# EAGLE board Pocket-Step-Up-Converter (EAGLE 6.5.0)
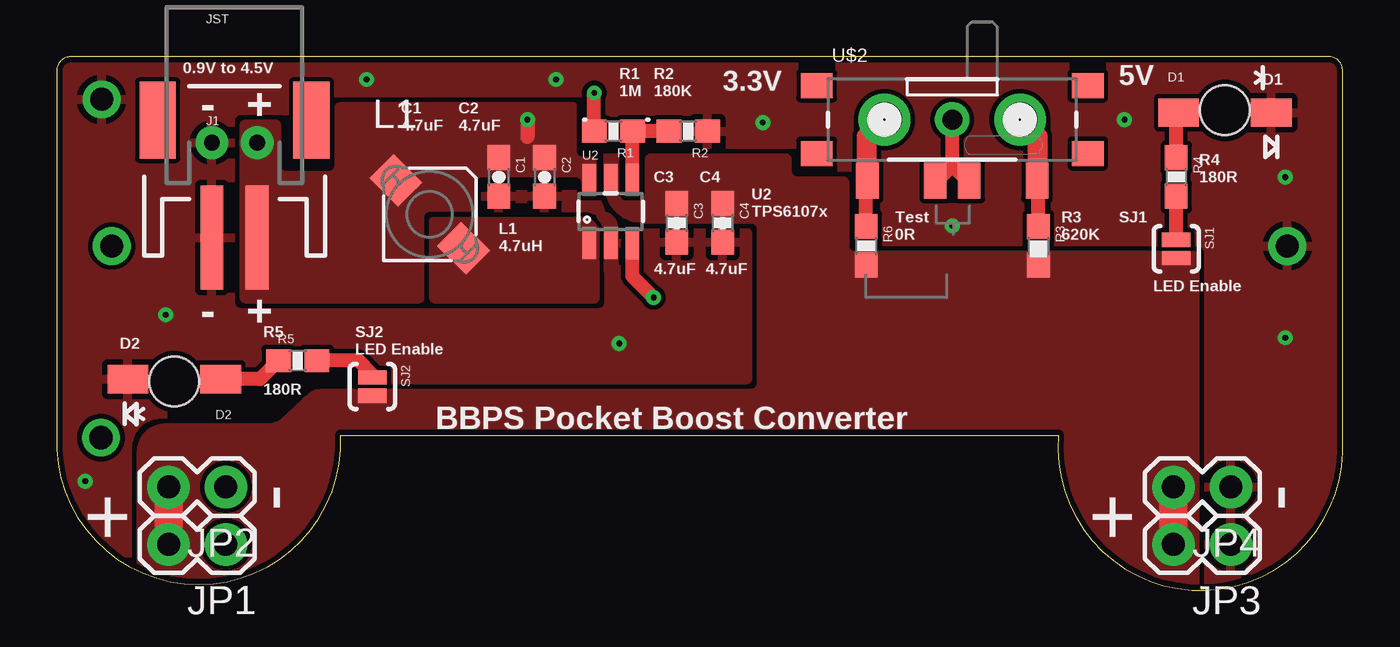
[diagram p0: board, top side]
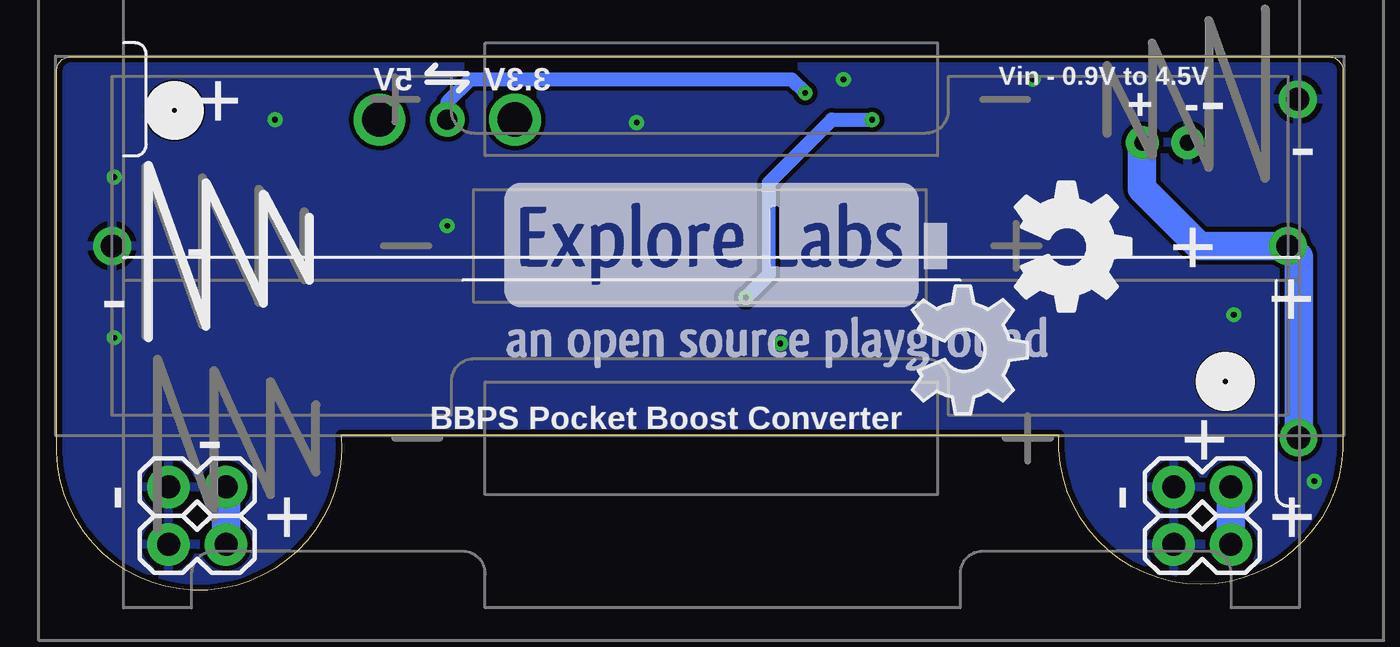
[diagram p1: board, bottom side, seen from below]

Size 56.91 x 23.62 mm. Coordinates in mm from the lower left corner, seen from the top.
Outline: 0,6.86 arc186 12.57,6.86 44.32,6.86 arc189 56.9,6.73 56.9,22.99 arc90 56.26,23.62 0.64,23.61 arc89 0,22.98 0,6.86
Copper layers (1*16): Top 0.035mm / dielectric 1.5mm / Bottom 0.035mm
Design rules "myDRUSparkFun 2": minimum track width 10mil, minimum drill 10mil, track to track 8mil, track to pad 8mil, pad to pad 8mil, via to via 8mil, smd to smd 8mil, copper to edge 10mil, drill to drill 8mil, minimum pad ring 10mil, minimum via ring 8mil, stop-mask expansion 4mil, vias tented up to drill 18mil, thermal gap 10mil
tRestrict: area 20.4,17.7 to 21,18; area 22.5,17.7 to 23,18; area 20.4,16.8 to 21,17.1

## Footprints (pad centres in the part's own frame; a part is rotated, then mirrored left to right if it is on the bottom)
BATTERY-AA-HOLDER-BBPS = drill 1.02 pad 1.676: GND 26,0; PWR -26,0
BATTERY-2AA-HOLDER-BBPS = drill 1.02 pad 1.676: GND -25.946,-7.5; PWR -25.974,7.47
0603-CAP = smd 1.1 x 1: 1 -0.85,0; 2 0.85,0
LED-REV-MOUNT = smd 1.8 x 1.25: ANODE -2.05,-0.1; CATHODE 2.05,-0.1 | hole 2.2: 0,0
JST-2-SMD = smd 1 x 4.6: 1 -1,-3.7; 2 1,-3.7 | smd 1.6 x 3.4: NC1 -3.4,1.5; NC2 3.4,1.5
1X02 = drill 1.016 pad 1.88: 1 0,0; 2 2.54,0
JST-2-PTH-NS = drill 0.7 pad 1.448: 1 -1,0; 2 1,0
INDUCTOR-MSS4020 = smd 1.5 x 1.8 rotated 45: 1 -1.5,1.5; 2 1.5,-1.5
0603-RES = smd 1.1 x 1: 1 -0.85,0; 2 0.85,0
SJ_2S-NOTRACE = smd 0.635 x 1.27: 1 -0.401,0; 2 0.413,0
DDC = smd 1.4 x 0.6: 1 -1.4,0.95; 2 -1.4,0; 3 -1.4,-0.95; 4 1.4,-0.95; 5 1.4,0; 6 1.4,0.95
SWITCH-SPST-SMD-A-FOR-BBPS = smd 1 x 1.6: A 3.75,-2.7; B 0.75,-2.7; C -0.75,-2.7; D -3.75,-2.7 | smd 1.4 x 1.1: GND@1 -6,1.5; GND@2 -6,-1.5; GND@3 6,1.5; GND@4 6,-1.5

## Placement (x,y rotation side)
BAT1  [BATTERY-AA-HOLDER-BBPS]  28.45,15.24 180 bottom
BAT2  [BATTERY-2AA-HOLDER-BBPS]  27.94,14.22 180 bottom
C1  4.7uF  [0603-CAP]  19.56,18.29 270 top
C2  4.7uF  [0603-CAP]  21.59,18.29 270 top
C3  4.7uF  [0603-CAP]  27.43,16.25 270 top
C4  4.7uF  [0603-CAP]  29.46,16.25 270 top
D1  Reverse Mount LED  [LED-REV-MOUNT]  51.69,21.23 0 top
D2  Reverse Mount LED  [LED-REV-MOUNT]  5.21,9.24 180 top
J1  [JST-2-SMD]  7.87,19.3 0 top
JP1  [1X02]  7.49,2.03 180 top
JP2  [1X02]  7.49,4.57 180 top
JP3  [1X02]  51.95,2.03 180 top
JP4  [1X02]  51.95,4.57 180 top
JST  [JST-2-PTH-NS]  7.87,19.81 0 top
L1  4.7uH  [INDUCTOR-MSS4020]  16.51,16.64 0 top
LOGO1  OSHW_LOGO_FILLX0200-NT  [OSHW_FILLX200_NOTEXT]  19.05,13.46 270 bottom
LOGO2  OSHW-LOGOS  [OSHW-LOGO-S]  65.53,-6.61 0 top  (outside the outline)
R1  1M  [0603-RES]  24.64,20.32 180 top
R2  180K  [0603-RES]  27.94,20.32 180 top
R3  620K  [0603-RES]  43.43,15.24 270 top
R4  180  [0603-RES]  49.53,18.29 270 top
R5  180  [0603-RES]  10.67,10.16 0 top
R6  8K  [0603-RES]  35.81,15.24 270 top
SJ1  SOLDERJUMPERNC2  [SJ_2S-NOTRACE]  49.53,15.11 270 top
SJ2  SOLDERJUMPERNC2  [SJ_2S-NOTRACE]  13.97,9.02 270 top
U2  TPS61070  [DDC]  24.51,16.76 90 top
U$2  SWITCH_SPDTSMD-NO-HOLES  [SWITCH-SPST-SMD-A-FOR-BBPS]  39.62,20.83 0 top
U$4  [EXLABS_LOGO_0.5]  37.85,8.13 0 bottom

## Library data of the parts
BAT1 BAT2 D1 D2 L1 U2 U$2 = 11xLabs
C1-C4 R1-R6 SJ1 SJ2 = SparkFun-Passives
J1 = SparkFun-Connectors; PROD_ID: CONN-08352
JP1-JP4 JST = SparkFun-Connectors
LOGO1 = ohw-logo
LOGO2 = SparkFun-Aesthetics
U$4 = ExLabs_Logo

## Nets
GND: BAT1.GND BAT2.GND C1.2 C2.2 C3.2 C4.2 D1.CATHODE D2.CATHODE J1.1 JP1.1 JP2.1 JP3.1 JP4.1 JST.1 R2.1 U2.2
N$1: R5.2 SJ2.1
N$2: R3.1 U$2.A
N$3: R1.1 R2.2 U2.4
N$4: R1.2 U$2.B U$2.C
N$5: D2.ANODE R5.1
N$6: R6.1 U$2.D
N$7: R4.2 SJ1.1
N$8: D1.ANODE R4.1
SW: L1.2 U2.1
VBAT: BAT1.PWR BAT2.PWR C1.1 C2.1 J1.2 JST.2 L1.1 U2.3 U2.6
VOUT: C3.1 C4.1 JP1.2 JP2.2 JP3.2 JP4.2 R3.2 R6.2 SJ1.2 SJ2.2 U2.5

## Tracks (layer width: path | path; a pad name or v marks a point on that pad's centre or on a via)
GND  (via drill 0.25)
  other vias: 13.72,22.6 24.89,10.92 1.27,4.82 54.36,11.17 47.24,20.83 54.36,18.29 31.24,20.7 22.1,22.6 4.83,12.19 39.62,16.13
  pour Top (rank 6): -1.02,-2.54 12.7,-2.54 12.7,6.86 44.2,6.86 44.2,-2.54 56.9,-2.54 56.9,25.4 -1.02,25.4
  pour Bottom (rank 6): -2.54,-0.26 12.7,-0.26 12.7,6.86 44.2,6.86 44.2,-0.51 58.17,-0.51 58.17,27.18 -2.54,27.18
  pour Top (no thermals): 24.23,14.07 24.23,15.98 arc11 23.95,16.43 23.82,16.8 arc-100 24.84,15.95 24.84,14.07
N$1
  Top 0.61: R5.2 13.36,10.16 13.97,9.54 SJ2.1
N$2
  Top 0.406: 43.43,18.13 U$2.A
  Top 0.61: R3.1 43.43,18.07 U$2.A
  Top 0.813: U$2.A 43.37,19.62
N$3
  Top 0.61: U2.4 25.46,20.29 R1.1 R2.2
N$4  (via drill 0.25, 0.89 pad 1.52)
  Top 0.61: 39.62,18.79 38.96,18.13 U$2.C | 39.62,18.79 40.29,18.13 U$2.B | R1.2 v23.79,22.01 | 39.62,18.79 v39.62,20.83
  Bottom 0.61: v23.79,22.01 24.38,22.6 38.61,22.6 39.62,21.59 v39.62,20.83
N$5
  Top 0.61: R5.1 9,9.34 D2.ANODE
N$6
  Top 0.406: 35.81,18.13 U$2.D
  Top 0.61: R6.1 35.81,17.98 arc-45 U$2.D
  Top 0.813: U$2.D 35.87,19.62
N$7
  Top 0.61: SJ1.1 R4.2
N$8
  Top 0.61: R4.1 49.53,21.02 D1.ANODE
N$9  (via drill 1.52)
  other vias: 36.63,20.83
N$11
  Top 0.813: 35.81,18.79 35.81,20.06 36.58,20.83
N$12  (via drill 1.52)
  other vias: 42.62,20.83
N$13
  Top 0.813: 43.43,18.54 43.43,20.06 42.67,20.83
SW
  pour Top (no thermals): 16.51,12.95 16.51,16.38 arc-90 16.76,16.51 23.24,16.51 arc-90 24,15.75 24,12.95 arc-90 23.75,12.7 16.76,12.7 arc-90
VBAT  (via drill 0.25)
  Top 0.61: U2.3 25.46,13.91 v26.42,12.95 | v20.83,20.83 20.83,20.06
  Bottom 0.61: v26.42,12.95 25.4,13.97 25.4,18.03 22.61,20.83 v20.83,20.83
  Bottom 1.27: BAT2.PWR 1.97,14.76 BAT1.PWR 6.35,15.24 8.89,17.78 8.89,19.79 JST.2
  pour Top (rank 2, no thermals): 23.88,18.92 23.88,17.78 arc-90 23.62,17.52 23.5,17.52 arc-90 23.24,17.78 23.24,18.03 arc90 22.99,18.29 18.8,18.29 arc90 18.54,18.03 18.54,17.02 arc-90 18.29,16.76 16.51,16.76 arc90 16.26,16.51 16.26,12.95 arc-90 16,12.7 8.38,12.7 arc-90 8.13,12.95 8.13,20.57 arc-90 8.38,20.83 9.65,20.83 arc-90 9.91,20.57 9.91,18.79 arc90 10.16,18.54 12.06,18.54 arc90 12.32,18.79 12.32,21.33 arc-90 12.57,21.59 22.86,21.59 arc-90 22.99,21.46 22.99,19.43 arc90 23.24,19.18 23.62,19.18 arc-90
VOUT
  Top 1.27: JP1.2 JP2.2 | JP4.2 JP3.2
  Bottom 1.27: JP1.2 JP2.2 | JP4.2 JP3.2
  pour Top (no thermals): 50.55,0 50.55,14.73 arc90 50.29,14.98 35.31,14.98 arc-90 35.05,15.24 35.05,18.03 arc90 34.8,18.29 32.77,18.29 arc-90 32.51,18.54 32.51,19.05 arc90 32.26,19.3 30.48,19.3 30.48,16.51 arc90 30.73,16.25 arc-90 30.99,16 30.99,9.14 arc-90 30.73,8.89 11.74,8.89 arc34 11.17,8.72 9.91,7.53 arc-34 9.34,7.36 4.83,7.36 arc90 3.56,6.09 3.56,-0.26 12.7,-0.26 12.7,6.86 44.2,6.86 44.2,0
  pour Top (no thermals): 30.86,19.3 26.29,19.3 arc90 26.04,19.05 26.04,17.4 24.89,17.4 24.89,19.3 24.21,19.3 24.21,18.03 arc90 25.98,16.25 30.86,16.25

## Text on the board
Document: R1, R2 resistor values
Reference: silk screen markings for selecting / voltage - 5V and 3.3V | JST connectors (SMT and TH) / facing down | Miter - 50 - Round | mirror image of bb | take care of height of the components / like screw terminals, JST conn. / where to put? on top or bottom (mirrored)? | bbps power rail headers / facing towards screen | BBPS smd dimensions | 41.34 mm from bottom rail's origin | 1650 mil
_tsilk: 0.9V to 4.5V | R1 | R2 | 5V | D1 | 1M | 180K | 3.3V | - | + | 4.7uF | C1 | 4.7uF | C2 | R4 | C3 | C4 | U2 | 180R | TPS6107x | Test | R3 | SJ1 | L1 | 0R | 620K | 4.7uH | 4.7uF | 4.7uF | LED Enable | - | + | D2 | R5 | LED Enable | SJ2 | 180R | BBPS Pocket Boost Converter | - | - | + | +
_bsilk: Vin - 0.9V to 4.5V | 3.3V | 5V | - | + | - | + | - | BBPS Pocket Boost Converter | - | - | + | +